# Altium PCB AltiumSTM32_PCB.PcbDoc
Units mm, origin at the board's own origin, x right, y up, seen from the top; angles counter-clockwise.
Board outline 35.02 x 34.77 mm, 4 copper layers (L1 (Signal), L2 (GND), L3 (GND), L4 (Signal)), stack 1.591 mm thick; 35 components, 27 nets, 170 pads, 68 vias.
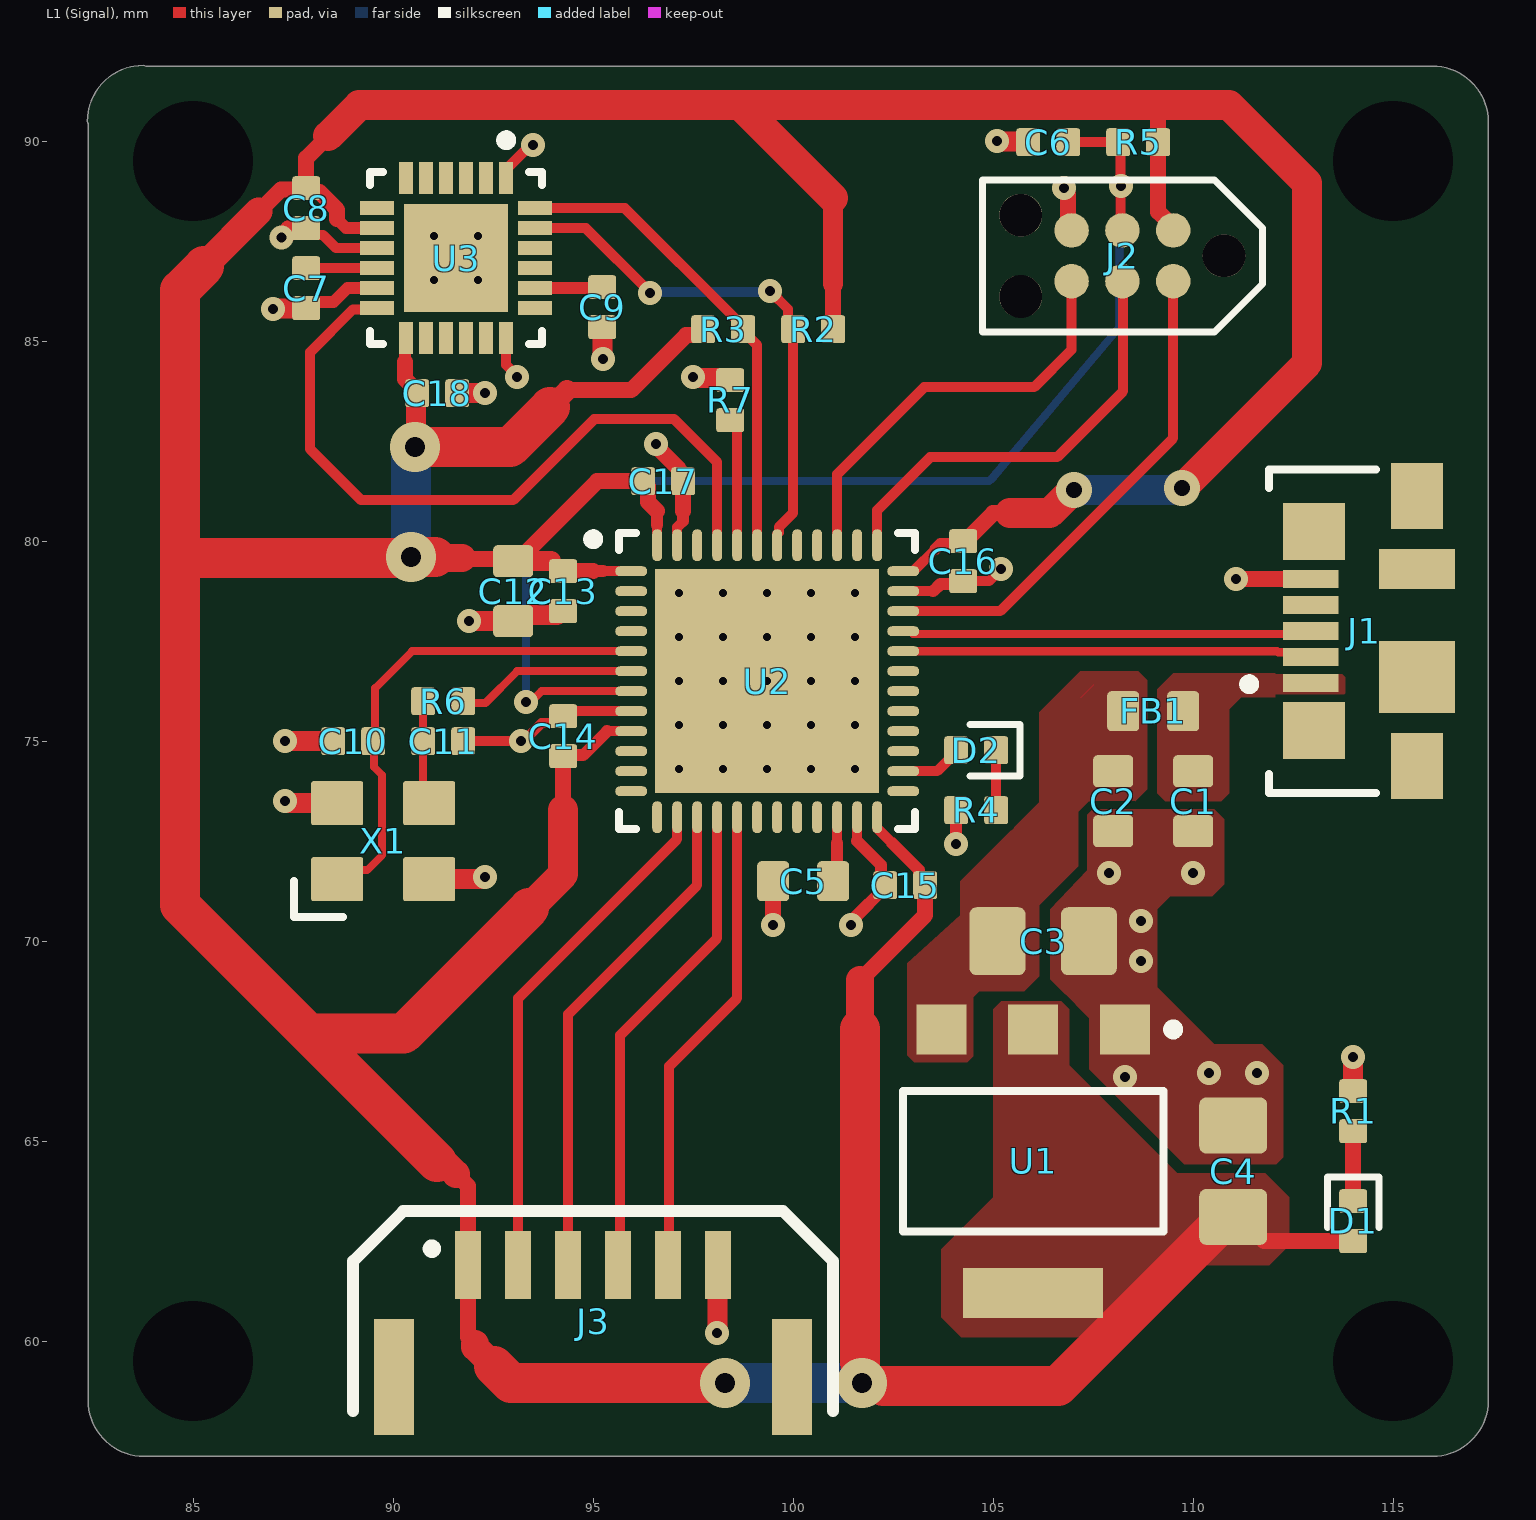
[diagram p0: L1 (Signal) view]
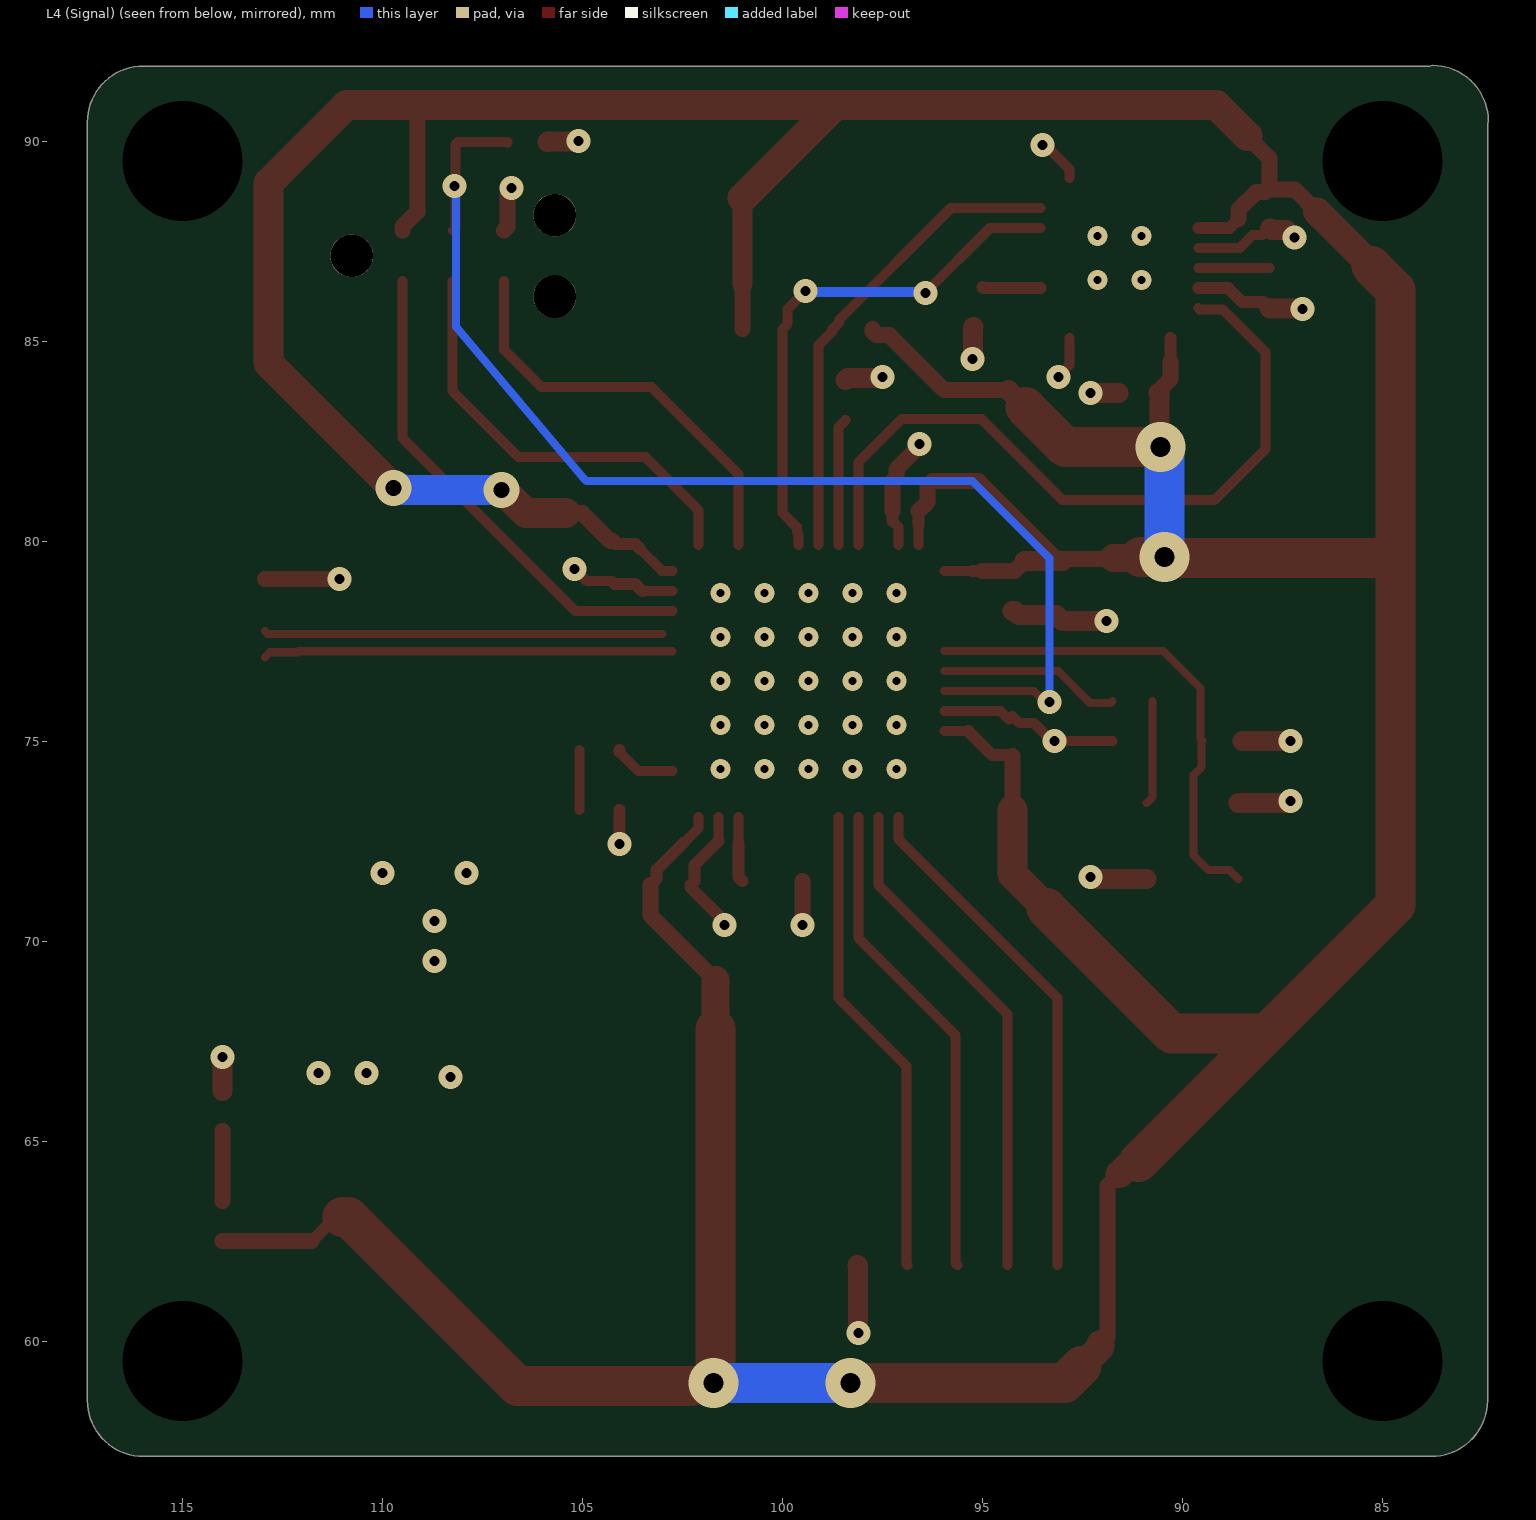
[diagram p1: L4 (Signal) view, seen from below]
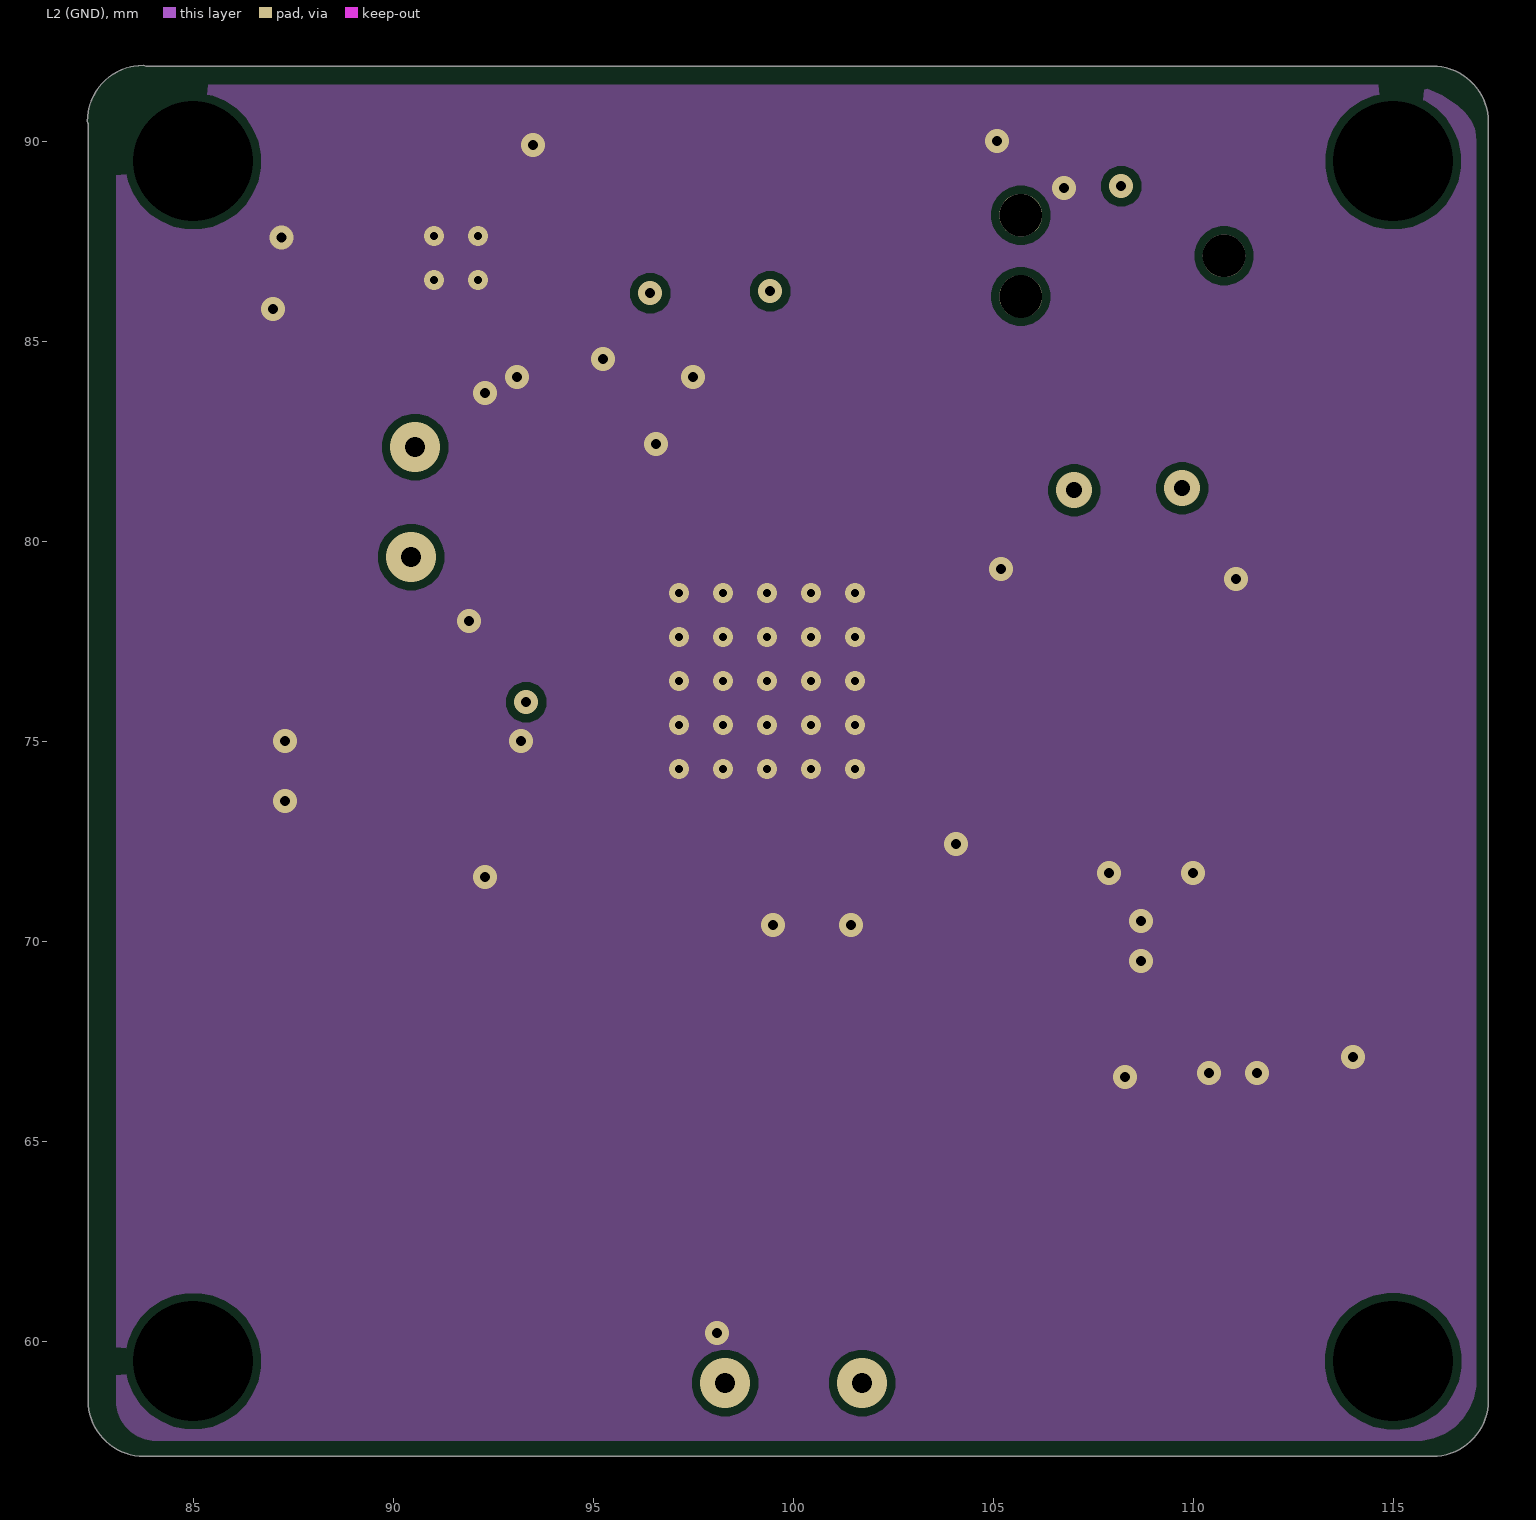
[diagram p2: L2 (GND)]
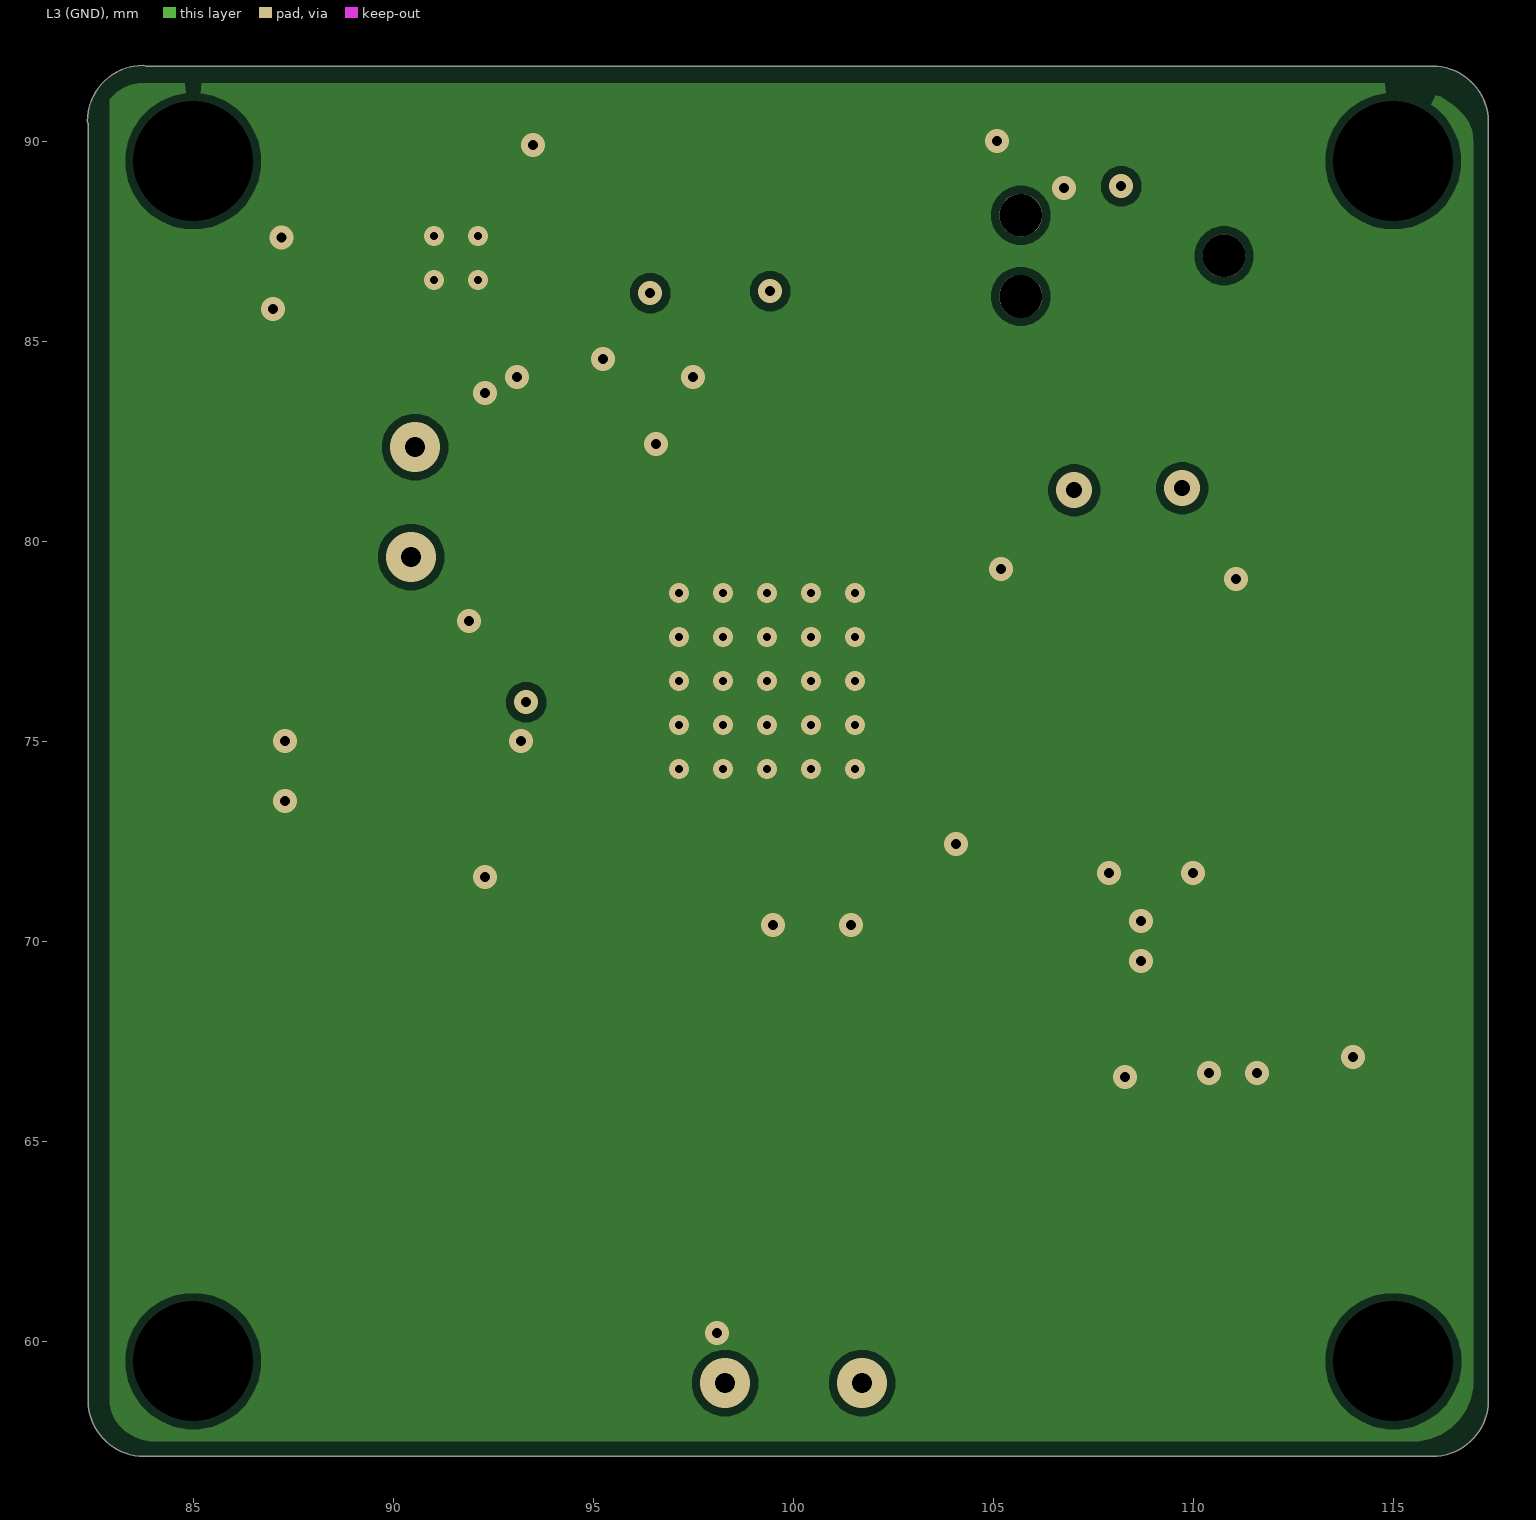
[diagram p3: L3 (GND)]
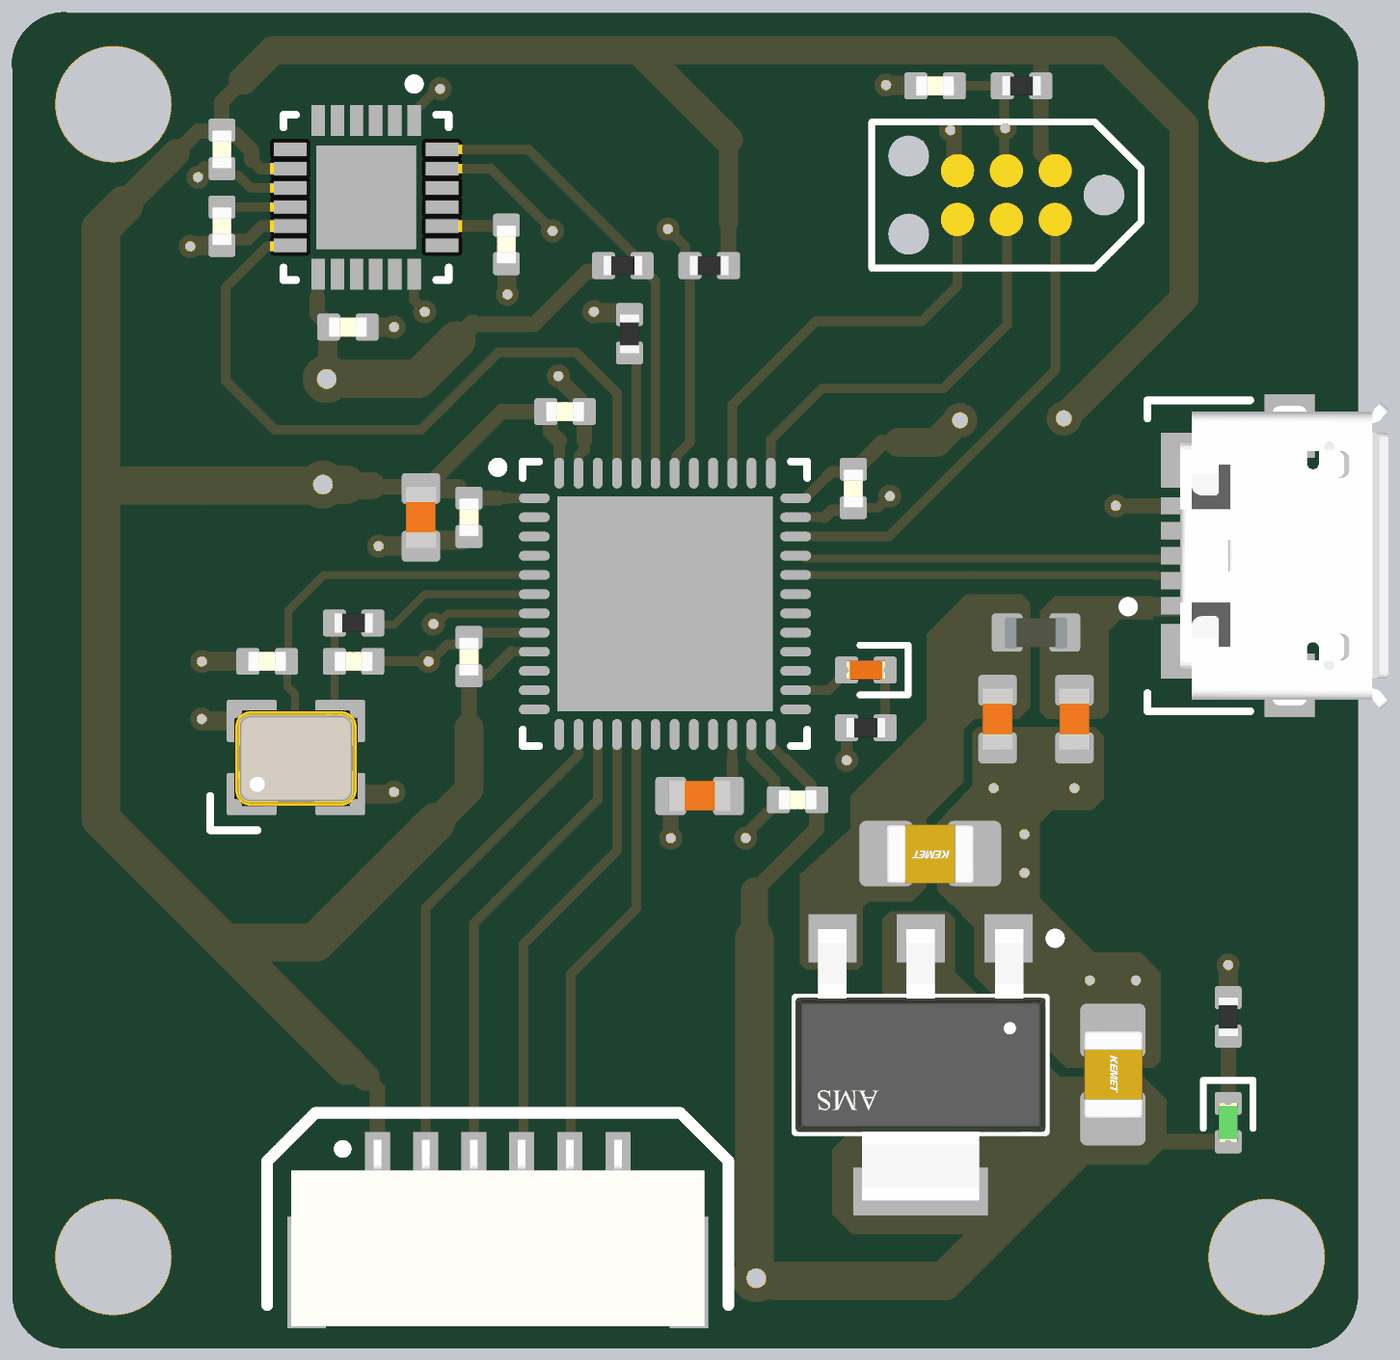
[diagram p4: 3D render of the assembled board from above, using the file's embedded part models]

## Layer stack, top to bottom
Top Solder: solder mask 0.0254, SM-001, Dk 4
L1 (Signal): signal copper 0.035
Dielectric 1: prepreg 0.2104, PP-017, Dk 4.4
L2 (GND): signal copper 0.0175
Dielectric 3: core 1.065, Core-039, Dk 4.6
L3 (GND): signal copper 0.0175
Dielectric 5: prepreg 0.2104, PP-017, Dk 4.4
L4 (Signal): signal copper 0.035
Bottom Solder: solder mask 0.0254, SM-001, Dk 4

## Board outline
82.373,58.52 82.373,90.431 82.353,90.5 cw(c83.75,90.5) 82.373,90.736 82.387,90.809 cw(c83.75,90.5) 83.441,91.863 83.514,91.877 cw(c83.75,90.5) 83.75,91.897 83.819,91.877 115.98,91.877 cw(c115.98,90.48) 117.377,90.48 117.377,58.52 cw(c115.98,58.52) 115.98,57.123 83.77,57.123 cw(c83.77,58.52)

## Design rules (kind name [scope] priority, off if disabled: settings)
Clearance [All] p1: gap=0.2 ignorepadtopadclearanceinfootprint=FALSE
DiffPairsRouting [All] p1: maxlimit=0.254 minlimit=0.127 mostfreqgap=0.254 toplayer_maxgap=0.127 toplayer_prefgap=0.127 toplayer_minwidth=0.203 toplayer_maxwidth=0.203 toplayer_prefwidth=0.203 bottomlayer_maxgap=0.127 bottomlayer_prefgap=0.127 bottomlayer_minwidth=0.203 bottomlayer_maxwidth=0.203 bottomlayer_prefwidth=0.203 impedanceprofiledriven=TRUE impedanceprofileid={1F0A7FEB-4A0E-4270-BC52-CC874D855A6B} impedanceprofilevalue=90.000000 maxuncoupledlength=12.7
HoleSize [All] p1: absolutevalues=TRUE maxlimit=2.54 minlimit=0.25 maxpercent=80.000 minpercent=20.000
HoleToHoleClearance [All] p1: gap=0.2 allowstackedmicrovias=TRUE
PolygonConnect [All] p1: connectstyle=Direct reliefconductorwidth=0.254 reliefentries=4 polygonreliefangle="90 Angle" airgapwidth=0.254
RoutingVias [All] p1: holewidth=0.3 width=0.7 viastyle="Through Hole" minholewidth=0.25 minwidth=0.55 maxholewidth=0.4 maxwidth=0.9
SolderMaskExpansion SolderMaskExpansion_Via [IsVia] p1: expansion=0.102 istentingtop=TRUE
SupplyNets "Schematic Supply Nets_3" [InNet('+5')] p1: voltage=0.000
SupplyNets "Schematic Supply Nets_2" [InNet('+3V3')] p2: voltage=0.000
SupplyNets "Schematic Supply Nets_1" [InNet('GND')] p3: voltage=0.000
SupplyNets "Schematic Supply Nets" [InNet('VBUS')] p4: voltage=0.000
UnRoutedNet [All] p1: checkbadconnections=TRUE
Width [All] p1: maxlimit=1 minlimit=0.2 preferedwidth=0.3 midlayer1_minwidth=0.254 midlayer1_maxwidth=0.254 midlayer1_prefwidth=0.254 midlayer2_minwidth=0.254 midlayer2_maxwidth=0.254 midlayer2_prefwidth=0.254 minimp=50.000000 maximp=50.000000 favimp=50.000000
26 further rules are at their usual default settings.

## Classes and differential pairs
net class DIFF_USB: USB_D_N USB_D_P
differential pair USB_D: +USB_D_P -USB_D_N

## Components (designator, comment, footprint, x,y, rotation, side; value= is the part's Value field where it differs from the comment)
C1 "2u2" CAP_0603 110,73.5 r90 top
C2 "2u2" CAP_0603 108,73.5 r90 top
C3 "22u" CAP_0805 106.25,70 r180 top
C4 "22u" CAP_0805 111,64.25 r270 top
C5 "2u2" CAP_0603 100.25,71.5 r0 top
C6 "100n" CAP_0402 106.375,89.975 r0 top
C7 "100n" CAP_0402 87.825,86.325 r90 top
C8 "10n" CAP_0402 87.825,88.325 r90 top
C9 "2n2" CAP_0402 95.225,85.85 r90 top
C10 "10p" CAP_0402 89,75 r0 top
C11 "10p" CAP_0402 91.25,75 r180 top
C12 "2u2" CAP_0603 93,78.75 r90 top
C13 "100n" CAP_0402 94.25,78.75 r90 top
C14 "100n" CAP_0402 94.25,75.125 r270 top
C15 "100n" CAP_0402 102.8,71.4 r0 top
C16 "100n" CAP_0402 104.25,79.5 r90 top
C17 "100n" CAP_0402 96.75,81.5 r180 top
C18 "100n" CAP_0402 91.1,83.7 r180 top
D1 "GREEN" LED_0402_GREEN 114,63 r90 top
D2 "RED" LED_0402_RED 104.575,74.775 r0 top
FB1 "120R" FB_0603 109,75.75 r180 top
J1 "473460001" FP-473460001-MFG 115.25,77.75 r90 top
J2 "TC2030-NL" TC2030-NL-FP 108.23,87.135 r180 top
J3 "SM06B-GHS-TB" SM06B-GHS-TB 95,60.5 r0 top
R1 "1k" RES_0402 114,65.75 r270 top
R2 "2K2" RES_0402 100.5,85.3 r0 top
R3 "2K2" RES_0402 98.25,85.3 r180 top
R4 "1k" RES_0402 104.575,73.275 r0 top
R5 "10k" RES_0402 108.625,89.975 r0 top
R6 "0R" RES_0402 91.25,76 r0 top
R7 "10k" RES_0402 98.425,83.525 r270 top
U1 "AMS1117-3.3" FP-AMS1117-IPC_C 106,64.5 r270 top
U2 "STM32F411CEU6" STM-UFQFPN48_L 99.35,76.5 r0 top
U3 "MPU-6050" IS-QFN-24_V 91.575,87.075 r270 top
X1 "24MHz" XTAL_3225 89.75,72.5 r0 top

## Footprints (in the part's own frame and the unit in brackets; to place one, negate y for a bottom-side part, rotate by r counter-clockwise, add the part's x,y. Pads: shape width x height; smd on the part's side, far side on the other; paste and mask are expansions set on the pad)
CAP_0402 [mm]
  rrect25% 0.6x0.7 smd: 1(-0.5,0) 2(0.5,0)
  body extent -0.5,-0.26 0.5,0.26, height 0.37
CAP_0603 [mm]
  rrect25% 0.8x1 smd: 1(-0.75,0) 2(0.75,0)
  body extent -0.8,-0.4 0.8,0.4, height 0.51
CAP_0805 [mm]
  rrect25% 1.4x1.7 smd: 1(-1.143,0) 2(1.143,0)
  body extent -1.15,-0.76 1.15,0.79, height 1.01
FB_0603 [mm]
  rrect25% 0.8x1 smd: 1(-0.75,0) 2(0.75,0)
  body extent -0.8,-0.4 0.8,0.4, height 0.81
FP-473460001-MFG [mm]
  rect 0.45x1.38 smd paste+0 mask+0: 1(-1.3,2.31) 2(-0.65,2.31) 3(0,2.31) 4(0.65,2.31) 5(1.3,2.31)
  rect 1.425x1.55 smd paste+0 mask+0: 6(-2.488,2.225) 7(2.488,2.225)
  rect 1.65x1.3 smd paste+0 mask+0: 8(-3.375,-0.35) 11(3.375,-0.35)
  rect 1.8x1.9 smd paste+0 mask+0: 9(-1.15,-0.35)
  rect 1x1.9 smd paste+0 mask+0: 10(1.55,-0.35)
  silkscreen extent -4.05,0.67 4.05,3.97, body extent -4.3,-2.48 4.3,3.45, height 0.25
FP-AMS1117-IPC_C [mm]
  rect 1.25x1.25 smd paste+0 mask+0: 1(-3.295,2.29) 2(-3.295,0) 3(-3.295,-2.29)
  rect 1.25x3.5 smd paste+0 mask+0: 4(3.295,0)
  silkscreen extent -3.42,-3.25 1.75,3.63, body extent -3.9,-3.35 3.9,3.35, height 0.25
IS-QFN-24_V [mm] "QFN, 24-Leads, Body 4x4mm, Pitch 0.5mm, Thermal Pad 2.7x2.6mm"
  rect 0.8x0.35 smd: 1(-2,1.25) 2(-2,0.75) 3(-2,0.25) 4(-2,-0.25) 5(-2,-0.75) 6(-2,-1.25) 13(2,-1.25) 14(2,-0.75) 15(2,-0.25) 16(2,0.25) 17(2,0.75) 18(2,1.25)
  rect 0.35x0.85 smd mask+0.102: 7(-1.25,-1.975) 8(-0.75,-1.975) 9(-0.25,-1.975) 10(0.25,-1.975) 11(0.75,-1.975) 12(1.25,-1.975) 19(1.25,1.975) 20(0.75,1.975) 21(0.25,1.975) 22(-0.25,1.975) 23(-0.75,1.975) 24(-1.25,1.975)
  rect 2.7x2.6 smd: 25(0,0)
  silkscreen extent -3.07,-2.15 2.15,2.15, body extent -2,-2 2,2, height 0.95
LED_0402_GREEN [mm]
  rrect25% 0.6x0.7 smd: A(-0.5,0) K(0.5,0)
  silkscreen extent -0.15,-0.65 1.1,0.65, body extent -0.51,-0.25 0.51,0.25, height 0.45
LED_0402_RED [mm]
  rrect25% 0.6x0.7 smd: A(-0.5,0) K(0.5,0)
  silkscreen extent -0.15,-0.65 1.1,0.65, body extent -0.51,-0.25 0.51,0.25, height 0.45
RES_0402 [mm]
  rrect25% 0.6x0.7 smd: 1(-0.5,0) 2(0.5,0)
  body extent -0.5,-0.25 0.5,0.25, height 0.3
SM06B-GHS-TB [mm]
  rect 0.65x1.7 smd: 1(-3.125,1.4) 2(-1.875,1.4) 3(-0.625,1.4) 4(0.625,1.4) 5(1.875,1.4) 6(3.125,1.4)
  rect 1x2.9 smd: ""(-4.975,-1.4) ""(4.975,-1.4)
  silkscreen extent -6,-2.25 6,2.75, body extent -5.38,-2.8 5.38,2.05, height 4.26
STM-UFQFPN48_L [mm] "QFN, 48-Leads, Body 7.1x7.1mm, Pitch 0.5mm, Thermal Pad 5.6x5.6mm, IPC High Density"
  oval 0.8x0.25 smd: 1(-3.4,2.75) 2(-3.4,2.25) 3(-3.4,1.75) 4(-3.4,1.25) 5(-3.4,0.75) 6(-3.4,0.25) 7(-3.4,-0.25) 8(-3.4,-0.75) 9(-3.4,-1.25) 10(-3.4,-1.75) 11(-3.4,-2.25) 12(-3.4,-2.75) 25(3.4,-2.75) 26(3.4,-2.25) 27(3.4,-1.75) 28(3.4,-1.25) 29(3.4,-0.75) 30(3.4,-0.25) 31(3.4,0.25) 32(3.4,0.75) 33(3.4,1.25) 34(3.4,1.75) 35(3.4,2.25) 36(3.4,2.75)
  oval 0.25x0.8 smd: 13(-2.75,-3.4) 14(-2.25,-3.4) 15(-1.75,-3.4) 16(-1.25,-3.4) 17(-0.75,-3.4) 18(-0.25,-3.4) 19(0.25,-3.4) 20(0.75,-3.4) 21(1.25,-3.4) 22(1.75,-3.4) 23(2.25,-3.4) 24(2.75,-3.4) 37(2.75,3.4) 38(2.25,3.4) 39(1.75,3.4) 40(1.25,3.4) 41(0.75,3.4) 42(0.25,3.4) 43(-0.25,3.4) 44(-0.75,3.4) 45(-1.25,3.4) 46(-1.75,3.4) 47(-2.25,3.4) 48(-2.75,3.4)
  rect 5.6x5.6 smd: 49(0,0)
  silkscreen extent -4.47,-3.7 3.7,3.7, body extent -3.55,-3.55 3.55,3.55, height 0.6
TC2030-NL-FP [mil]
  round 33.98 smd paste-16.99: 1(-50,-25) 2(-50,25) 3(0,-25) 4(0,25) 5(50,-25) 6(50,25)
  round 42.01 hole 42.01 unplated: MH(-100,0) MH(100,-40) MH(100,40)
  silkscreen extent -138,-75 138,75
XTAL_3225 [mm]
  rrect10% 1.3x1.1 smd: 1(-1.15,-0.95) 2(1.15,-0.95) 3(1.15,0.95) 4(-1.15,0.95)
  silkscreen extent -2.23,-1.89 -1,-1, body extent -1.6,-1.28 1.6,1.22, height 0.61

## Part data
C1 C2 C5 C12: library part CAP_0603, "Capacitor SMD 0603"
C3 C4: library part CAP_0805, "Capacitor SMD 0805"
C6 C7 C8 C9 C10 C11 C13 C14 C15 C16 C17 C18: library part CAP_0402, "Capacitor SMD 0402"
D1: library part LED_0402_GREEN, "LED 0402 GREEN SMD"
D2: library part LED_0402_RED, "LED 0402 RED SMD"
FB1: library part FB_0603, "Ferrite Bead SMD 0603"
J1: library part CMP-2000-05246-2, "CONN RCPT USB2.0 MICRO B SMD R/A", Current Rating=1.8A, Manufacturer=Molex, Package=0, Temperature="-30°C to +85°C", Temperature Range High=+85°C, Temperature Range Low=-30°C, Voltage Rating=30V, Automotive=No, Category=Conn, ComponentLink2Description=Datasheet, ComponentLink2URL=https://www.molex.com/webdocs/datasheets/pdf/en-us/0473460001_IO_CONNECTORS.pdf, Conn Orientation="Right Angle", Contact Material=Gold,Nickel, Device Class L1=Connectors, Device Class L2="USB Connectors", Device Class L3=unset, Digikey Description="CONN RCPT USB2.0 MICRO B SMD R/A", Footprint Url=https://www.molex.com/pdm_docs/sd/473460001_sd.pdf, Height=2.945mm, Is Female=yes, Lead Free=Yes, Manufacturer Part Number=473460001, Number Of Contacts=5, Octopart=https://octopart.com/47346-0001-molex-7164928, Pitch=0.65mm, RoHS=TRUE, Shielding=true, Usb Standard="USB 2.0"
J2: "Tag-Connect No-Solder SWD Debug Connector (No Legs) DO NOT PLACE", Manufacturer=Tag-Connect, Manufacturer Part Number=TC2030-NL-FP
J3: "Header Connector 6 Position 1.25MM Pitch SMD Horizontal JST GH", Manufacturer=JST, Manufacturer Part Number=SM06B-GHS-TB
R1 R2 R3 R4 R5 R6 R7: library part RES_0402, "Resistor SMD 0402"
U1: library part CMP-209535-000001-1, "LDO Voltage Regulators 1A, 3.3V", Dropout Voltage=1.1V, Manufacturer="Advanced Monolithic Systems", Max Junction Temp=+125°C, Max Power Dissipation=1.2W, Max Supply Voltage=15V, Nominal Supply Current=5mA, Output Current=1A, Output Voltage=3.3V, Package=AMS1117, Temperature="-40°C to +125°C", Temperature Range Low=-40°C, Automotive=No, Category=IC, ComponentLink2Description=Datasheet, ComponentLink2URL=http://www.advanced-monolithic.com/pdf/ds1117.pdf, Device Class L1="Integrated Circuits (ICs)", Device Class L2="Power Management ICs", Device Class L3="Voltage Regulators - Linear", Height=1.8mm, Ipc Land Pattern Name=SOT229P700X180-4, Lead Free=Yes, Manufacturer Part Number=AMS1117-3.3, Number Of Outputs=1, Octopart=https://octopart.com/ams1117-3.3-advanced+monolithic+systems-25899300, Output Type=Fixed, RoHS=TRUE, Standoff Height=0.64mm, Temperature Range High=+125°C
U2: library part CMP-0243-00165-1, "ARM Cortex-M4 32-bit MCU+FPU, 512 KB Flash, 128 KB RAM, 36 I/Os, 48-Pin UFQFPN, -40 to 85 degC, Tray", I/Os (High Current)=36, Operating Frequency(F) (Processor speed) (MHz)=100, Package Description=UFQFPN48, Package Reference="48-Pin Ultra Thin Fine Pitch Quad Flat No-Lead, 7 x 7 x 0.6 mm Body, 0.5 mm Pitch, Exposed Pad", Supply Voltage(Vcc) min (V)=1.7, ComponentLink1Description="Manufacturer URL", ComponentLink1URL=http://www.st.com/, ComponentLink2Description=Datasheet, ComponentLink2URL=http://www.st.com/st-web-ui/static/active/en/resource/technical/document/datasheet/DM00115249.pdf, Core="ARM Cortex-M4", DatasheetVersion="Rev. 6", FLASH Size (Prog) (kB)=512, Internal RAM Size (kB)=128, Mounting Technology="Surface Mount", Packing=Tray
U3: library part CMP-1753-00002-2, "3-Axis Gyroscope, Accelerometer and a Digital Motion Processor(TM) (DMP), 2.375 to 3.46 V, -40 to 85 degC, 24-Pin QFN, RoHS, Tape and Reel", Manufacturer=InvenSense, Standard Package=5,000, Category=Sensors,Transducers, Datasheet URL=http://datasheet.octopart.com/MPU-6050-InvenSense-datasheet-14421344.pdf, Datasheet Version="Rev. 3.3, 05/2012", Dynamic Catalog=MPU-6000™Series, Family=Multifunction, Featured Product=MPU-60506-Axis,IntegratedI²CSolution, Manufacturer URL=http://www.invensense.com/, Online Catalog=MPU-6000™Series, Other Names="1428-1007-2 / MPU6050", Output Type=Digital, Sensor Type=MotionTracking, Unit PriceUSD=Digital
X1: library part TSX-3225_24.0000MF15X-AC, "Crystal SMD 24MHz 10PPM 7pF 3225", Manufacturer=Epson, Manufacturer Part Number="TSX-3225 24.0000MF15X-AC"

## Free pads (board coordinates)
  round 1.524 hole 3 mask+0.2: 2(85,59.5) 2(85,89.5) 2(115,59.5) 2(115,89.5)

## Via types
v1: diameter 0.6, hole 0.25, L1 (Signal) to L4 (Signal), tented both sides, 33 vias
v2: diameter 0.5, hole 0.2, L1 (Signal) to L4 (Signal), tented both sides, 29 vias
v3: diameter 1.25, hole 0.5, L1 (Signal) to L4 (Signal), tented both sides, 4 vias
v4: diameter 0.9, hole 0.4, L1 (Signal) to L4 (Signal), tented both sides, 2 vias

## Nets (pads, with @x,y where several pads share a name; then routed paths per layer and width w, separated by ;. In a path a pad name is that pad's centre, name@x,y a point inside that pad or via, vN(x,y) a via of type N, cw(c..) or ccw(c..) an arc to the next point about the centre after c; other vN are vias at no path point)
+3V3: C4.2 C8.2 C12.2 C13.2 C14.2 C15.2 C16.2 C17.2 C18.2 D1.A J2.1 J3.1 R2.2 R3.2 R5.2 U1.2 U1.4 U2.1 U2.9 U2.24 U2.36 U2.48 U3.8 U3.13 | length 172.4
  L1 (Signal) w0.25: 95.25,79.25 U2.1 ; 95.35,75.25 U2.9 ; U2.48 96.6,80.4 ; U2.24 102.1,72.825 102.475,72.45 ; U2.36 103.025,79.25 103.025,79.275 103.559,79.809
  L1 (Signal) w0.3: 88.6,88.05 88.825,87.825 U3.8 ; 90.3,84.5 U3.13@90.3,85.075 ; C14.2@94.313,74.563 94.4,74.65 94.75,74.65 95.35,75.25 ; 95,79.25 95.25,79.25 ; 96.6,80.4 96.6,80.75 ; 102.475,72.45 102.95,71.975 103.15,71.775 103.15,71.55 C15.2 ; 103.559,79.809 103.679,79.929 104.179,79.929 C16.2 ; C4.2 111.164,63.107 C4.2@111.771,62.5
  L1 (Signal) w0.4: 86.637,88.238 87.197,88.798 87.798,88.798 C8.2 ; 88.375,90.125 87.825,89.575 C8.2 ; 88.6,88.05 88.6,88.285 88.16,88.725 87.925,88.725 C8.2 ; 90.3,84.481 90.3,84.05 90.5,83.85 90.5,83.8 C18.2 ; 91.575,64.175 91.875,63.875 J3.1 91.875,60.1 92.05,59.925 ; 91.75,79.55 92.95,79.55 C12.2 93.1,79.5 95.1,81.5 C17.2 ; C13.2@93.95,79.5 94.2,79.25 C13.2 95,79.25 ; 94.25,73.275 C14.2 ; 94.35,83.775 95.95,83.775 97.325,85.15 97.65,85.15 97.75,85.25 R3.2 ; C17.2@96.371,81.379 96.371,80.979 96.6,80.75 ; R2.2 101,86.425 ; 101.675,69.025 103.3,70.65 C15.2 ; C16.2 104.3,80 105,80.7 105.425,80.7 ; 109.125,90.855 109.125,90.125 109.125,88.236 109.5,87.861 J2.1 ; C4.2@111.771,62.5 D1.A
  L1 (Signal) w0.5: v3(90.55,82.35) 90.575,82.375 90.575,83.675 C18.2 ; C12.2 C13.2@93.95,79.5 ; 93.925,83.35 94.35,83.775 ; 101,86.425 101,88.575
  L1 (Signal) w0.7: 85.275,86.876 86.637,88.238 ; 91.075,79.575 91.725,79.575 ; 91.1,64.475 91.275,64.475 91.575,64.175 ; 92.05,59.925 92.05,59.85 92.525,59.375 ; 101.675,67.8 101.675,69.025
  L1 (Signal) w0.75: 88.375,90.125 89.15,90.9 98.675,90.9 ; 93.4,70.825 94.25,71.675 94.25,73.275 ; 101,88.575 98.675,90.9 ; 105.425,80.7 106.409,80.7 106.984,81.275 v4(107.025,81.275) ; v4(109.725,81.325) 112.85,84.45 112.85,88.95 110.9,90.9 98.675,90.9
  L1 (Signal) w1: 85.275,86.875 84.675,86.275 84.675,79.575 ; v3(90.55,82.35) 92.925,82.35 93.925,83.35 ; v3@91.05,79.6 v3(90.45,79.6) 90.425,79.575 84.675,79.575 ; 91.1,64.475 87.888,67.687 ; 92.525,59.375 92.95,58.95 v3(98.3,58.95) ; 93.4,70.825 90.263,67.687 87.888,67.687 ; v3@101.675,59.461 101.675,67.8 ; v3@102.261,58.875 106.618,58.875 110.85,63.107 C4.2 ; 84.675,79.575 84.675,70.9 87.888,67.687
  L4 (Signal) w0.75: v4(107.025,81.275) 109.475,81.275 109.5,81.3 109.7,81.3 v4(109.725,81.325)
  L4 (Signal) w1: v3(90.45,79.6) 90.45,82.182 90.55,82.282 v3(90.55,82.35) ; v3(98.3,58.95) v3(101.725,58.95)
+5: C2.2 C3.2 FB1.2 U1.3
GND: C1.1 C2.1 C3.1 C4.1 C5.1 C6.1 C7.1 C8.1 C9.1 C10.1 C11.1 C12.1 C13.1 C14.1 C15.1 C16.1 C17.1 C18.1 J1.5 J2.5 J3.6 R1.1 R4.1 R7.1 U1.1 U2.8 U2.23 U2.35 U2.47 U2.49 U3.1 U3.9 U3.11 U3.18 U3.25 X1.2 X1.4 | length 38
  L1 (Signal) w0.25: C8.1 88,87.65 88.25,87.65 88.575,87.325 U3.9 ; C11.1 v1(93.2,75) 93.255,75 93.705,75.45 94.075,75.45 C14.1 ; U3.18 92.825,84.408 93.1,84.133 v1(93.1,84.1) ; U3.1 92.825,89.3 93.425,89.9 v1(93.5,89.9) ; C14.1@94.338,75.537 94.55,75.75 U2.8 ; U2.47 97.1,80.35 97.25,80.5 ; 101.6,72.5 U2.23 ; U2.35 103.5,78.75 ; C16.1 104.892,79 105.192,79.3 v1(105.2,79.3)
  L1 (Signal) w0.3: C7.1 87.975,85.975 88.503,85.975 88.853,86.325 89.005,86.325 U3.11 ; 97.25,80.5 97.25,80.75 ; v1(101.45,70.4) 101.507,70.457 101.507,70.557 102.3,71.35 C15.1 ; 101.6,72.5 102.2,71.9 C15.1@102.2,71.5 ; 103.5,78.75 103.682,78.932 C16.1@104.182,78.932 ; v1(104.075,72.425) R4.1
  L1 (Signal) w0.4: v1(96.575,82.425) 96.575,82.371 97.15,81.796 97.15,81.6 C17.1 97.25,80.75 ; v1(99.5,70.4) C5.1 ; v1(106.775,88.825) 106.775,88.771 106.871,88.674 106.871,87.859 J2.5 ; v1(111.075,79.05) J1.5
  L1 (Signal) w0.5: v1(87,85.8) 87.013,85.813 87.812,85.813 C7.1 ; v1(87.201,87.599) 87.228,87.599 87.404,87.775 87.775,87.775 C8.1@87.812,87.813 ; v1(87.3,73.5) 87.327,73.5 87.377,73.45 X1.4 ; v1(87.3,75) C10.1 ; X1.2 92.223,71.55 92.273,71.6 v1(92.3,71.6) ; C18.1 v1(92.3,83.7) ; v1(91.9,78) C12.1 93.15,78.15 94.1,78.15 94.2,78.25 C13.1 ; C9.1 95.238,85.338 95.238,84.563 v1(95.25,84.55) ; v1(97.5,84.1) 97.527,84.1 97.552,84.075 98.375,84.075 R7.1 ; v1(98.1,60.2) 98.113,60.213 98.113,61.888 J3.6 ; v1(105.1,90) 105.113,89.987 105.863,89.987 C6.1 ; R1.1 v1(114,67.1)
  other v1: 108.3,66.6 110.4,66.7 111.6,66.7 108.7,69.5 108.7,70.5 107.9,71.7 110,71.7
  other v2: 97.15,74.3 98.25,74.3 99.35,74.3 100.45,74.3 101.55,74.3 97.15,75.4 98.25,75.4 99.35,75.4 100.45,75.4 101.55,75.4 97.15,76.5 98.25,76.5 99.35,76.5 100.45,76.5 101.55,76.5 97.15,77.6 98.25,77.6 99.35,77.6 100.45,77.6 101.55,77.6 97.15,78.7 98.25,78.7 99.35,78.7 100.45,78.7 101.55,78.7 91.025,86.525 92.125,86.525 91.025,87.625 92.125,87.625
IMU_CPOUT: C9.2 U3.20 | length 1.5
  L1 (Signal) w0.3: U3.20 94.975,86.325 C9.2@95,86.35
IMU_INT: U2.45 U3.12 | length 18.6
  L1 (Signal) w0.25: U3.12 89.572,85.797 88.997,85.797 87.925,84.725 87.925,82.3 89.2,81.025 93,81.025 95.025,83.05 97.025,83.05 98.1,81.975 U2.45
IMU_REGOUT: C7.2 U3.10 | length 1.8
  L1 (Signal) w0.25: C7.2 U3.10
IMU_SCL: R2.1 U2.42 U3.23 | length 13.3
  L1 (Signal) w0.25: U3.23 94.816,87.825 96.425,86.216 v1(96.425,86.2) ; v1(99.425,86.25) 99.869,85.806 99.869,85.431 R2.1 100,80.711 99.64,80.352 99.64,80.215 99.6,80.175 U2.42@99.6,79.91
  L4 (Signal) w0.25: v1(96.425,86.2) 96.45,86.225 99.4,86.225 v1(99.425,86.25)
IMU_SDA: R3.1 U2.43 U3.24 | length 12
  L1 (Signal) w0.25: U3.24 95.791,88.325 98.575,85.541 98.575,85.475 R3.1 ; R3.1@98.75,85.25 99.1,84.9 U2.43
LED_PWR_K: D1.K R1.2 | length 1.7
  L1 (Signal) w0.4: D1.K R1.2
MCU_BOOT0: R7.2 U2.44 | length 3.2
  L1 (Signal) w0.25: R7.2 98.6,82.85 U2.44
MCU_LED_A: D2.A U2.26 | length 1.6
  L1 (Signal) w0.25: U2.26 103.6,74.25 D2.A@104.075,74.725
  L1 (Signal) w0.3: D2.A@104.075,74.725 D2.A
MCU_LED_K: D2.K R4.2 | length 1.5
  L1 (Signal) w0.25: R4.2 D2.K
MCU_NRST: C6.2 J2.3 R5.1 U2.7 | length 30.8
  L1 (Signal) w0.2: v1(93.325,75.975) 93.433,75.975 93.708,76.25 U2.7 ; C6.2@106.875,89.925 C6.2
  L1 (Signal) w0.25: C6.2 R5.1 108.178,89.922 108.178,87.823 J2.3
  L4 (Signal) w0.2: v1(93.325,75.975) 93.325,79.575 95.25,81.5 104.896,81.5 104.954,81.559 104.96,81.565 108.156,85.356 108.156,88.831 v1(108.2,88.875)
MCU_OSC_IN: C10.2 U2.5 X1.1 | length 12.4
  L1 (Signal) w0.2: X1.1 88.825,71.775 89.35,71.775 89.725,72.15 89.725,74.15 89.525,74.35 89.525,74.975 C10.2 89.55,75.05 89.55,76.325 90.475,77.25 U2.5
MCU_OSC_OUT: R6.2 U2.6 | length 4.5
  L1 (Signal) w0.2: R6.2 91.792,75.958 92.308,75.958 93.1,76.75 U2.6
MCU_PA4: J3.2 U2.14 | length 12.8
  L1 (Signal) w0.25: J3.2 93.125,68.575 97.1,72.55 U2.14
MCU_PA5: J3.3 U2.15 | length 12.5
  L1 (Signal) w0.25: J3.3 94.375,68.175 97.6,71.4 U2.15
MCU_PA6: J3.4 U2.16 | length 12.2
  L1 (Signal) w0.25: J3.4 95.675,61.95 95.675,67.65 98.1,70.075 U2.16
MCU_PA7: J3.5 U2.17 | length 11.9
  L1 (Signal) w0.25: J3.5 96.9,61.925 96.9,66.875 98.6,68.575 U2.17
MCU_SWCLK: J2.4 U2.37 | length 11
  L1 (Signal) w0.25: U2.37 102.1,80.775 103.425,82.1 106.6,82.1 108.25,83.75 108.25,86.48 J2.4
MCU_SWDIO: J2.2 U2.34 | length 12.5
  L1 (Signal) w0.25: U2.34 105.175,78.25 109.5,82.575 J2.2
MCU_SWO: J2.6 U2.39 | length 10.6
  L1 (Signal) w0.25: U2.39 101.1,81.675 103.275,83.85 106.025,83.85 106.96,84.785 J2.6
MCU_VCAP1: C5.2 U2.22 | length 1.6
  L1 (Signal) w0.25: 101.1,72.45 U2.22
  L1 (Signal) w0.3: C5.2 101.1,71.6 101.1,72.45
USB_D_N: J1.2 U2.32 | length 10.3
  L1 (Signal) w0.203: U2.32 112.099,77.25 112.125,77.223 112.817,77.223 J1.2
USB_D_P: J1.3 U2.33 | length 10
  L1 (Signal) w0.203: U2.33@102.998,77.677 112.867,77.677 J1.3
VBUS: C1.2 FB1.1 J1.1
XTAL_IN: C11.2 R6.1 X1.3 | length 2.6
  L1 (Signal) w0.2: R6.1 C11.2 90.75,73.6 X1.3
pads on no net: J1.4 J1.6 J1.7 J1.8 J1.9 J1.10 J1.11 J2.MH J3. U2.2 U2.3 U2.4 U2.10 U2.11 U2.12 U2.13 U2.18 U2.19 U2.20 U2.21 U2.25 U2.27 U2.28 U2.29 U2.30 U2.31 U2.38 U2.40 U2.41 U2.46 U3.2 U3.3 U3.4 U3.5 U3.6 U3.7 U3.14 U3.15 U3.16 U3.17 U3.19 U3.21 U3.22

## Polygon pours and split planes (outlines as drawn)
+5 on L1 (Signal) "+5_L01_P012" (solid, pour order 12): 107.393,73.5 107.125,73.232 107.125,71.875 106.15,70.9 106.15,69.125 105.775,68.75 104.65,68.75 104.5,68.6 104.5,67.125 104.35,66.975 103.025,66.975 102.85,67.15 102.85,69.45 104.175,70.65 104.175,71.5 106.15,73.475 106.15,75.725 107.175,76.75 108.625,76.75 108.85,76.525 108.85,73.8 108.55,73.5
GND on L1 (Signal) "GND_L01_P010" (solid, remove dead copper, pour order 10): 110.775,71.425 110.775,73.05 110.525,73.3 107.49,73.3 107.35,73.16 107.35,71.776 106.425,70.8 106.425,69.05 107.4,68.075 107.4,66.8 109.775,64.425 112.075,64.425 112.25,64.6 112.25,66.9 111.725,67.425 110.525,67.425 109.1,68.85 109.1,70.8 109.425,71.125 110.475,71.125
+3V3 on L1 (Signal) "+3V3_L01_P006" (solid, remove dead copper, pour order 6): 106.9,68.3 106.7,68.5 105.2,68.5 105,68.3 105,63.6 103.7,62.3 103.7,60.6 104.2,60.1 108,60.1 109.8,61.9 111.9,61.9 112.4,62.4 112.4,63.6 111.8,64.2 109.6,64.2 106.9,66.9
no net on L1 (Signal) "NONET_L01_P005" (solid, pour order 5): 107.5,76.4 107.2,76.1
VBUS on L1 (Signal) "VBUS_L01_P003" (solid, remove dead copper, pour order 3): 113.7,76.7 109.5,76.7 109.1,76.3 109.1,73.7 109.3,73.5 110.7,73.5 110.9,73.7 110.9,75.8 111.2,76.1 113.7,76.1 113.8,76.2 113.8,76.6
GND on L3 (GND) "GND_L03_P007" (solid, pour order 7): 83,91 83.117,91.117 cw(c83.8,90.434) 83.8,91.4 115.036,91.4 cw(c115.036,89.038) 116.706,90.708 cw(c116,90) 117,90 117,59 cw(c115.5,59) 115.5,57.5 84,57.5 cw(c84,58.5) 83,58.5
GND on L3 (GND) "GND_L03_P009" (solid, remove dead copper, pour order 9): 82.915,91.049 83.032,91.166 cw(c83.715,90.483) 83.715,91.449 114.951,91.449 cw(c114.951,89.087) 116.621,90.757 cw(c115.915,90.049) 116.915,90.049 116.915,59.049 cw(c115.415,59.049) 115.415,57.549 83.915,57.549 cw(c83.915,58.549) 82.915,58.549
GND on L2 (GND) "GND_L02_P011" (solid, pour order 11): 83.076,91.017 83.194,91.134 cw(c83.876,90.451) 83.876,91.417 115.112,91.417 cw(c115.112,89.055) 116.782,90.725 cw(c116.076,90.017) 117.076,90.017 117.076,59.017 cw(c115.576,59.017) 115.576,57.517 84.076,57.517 cw(c84.076,58.517) 83.076,58.517

## Silkscreen, mask and mechanical layers (free items; w line width, h text height)
Mechanical 1:
  lines w0.254: 82.48,90.5 cw(c83.75,90.5) 83.75,91.77 ; 82.5,90.75 82.5,58.52 ccw(c83.77,58.52) 83.77,57.25 115.98,57.25 ccw(c115.98,58.52) 117.25,58.52 117.25,90.48 ccw(c115.98,90.48) 115.98,91.75 83.5,91.75

## Text inside footprints (layer, text, board x,y; h text height)
D1: Mechanical 13 "+" at 113.492,61.117 h0.5 r90
D2: Mechanical 13 "+" at 102.692,75.283 h0.5